# EAGLE board Filter boards jp6 v2.0 moog v1.2.1 - v1.0 (EAGLE 9.6.2)
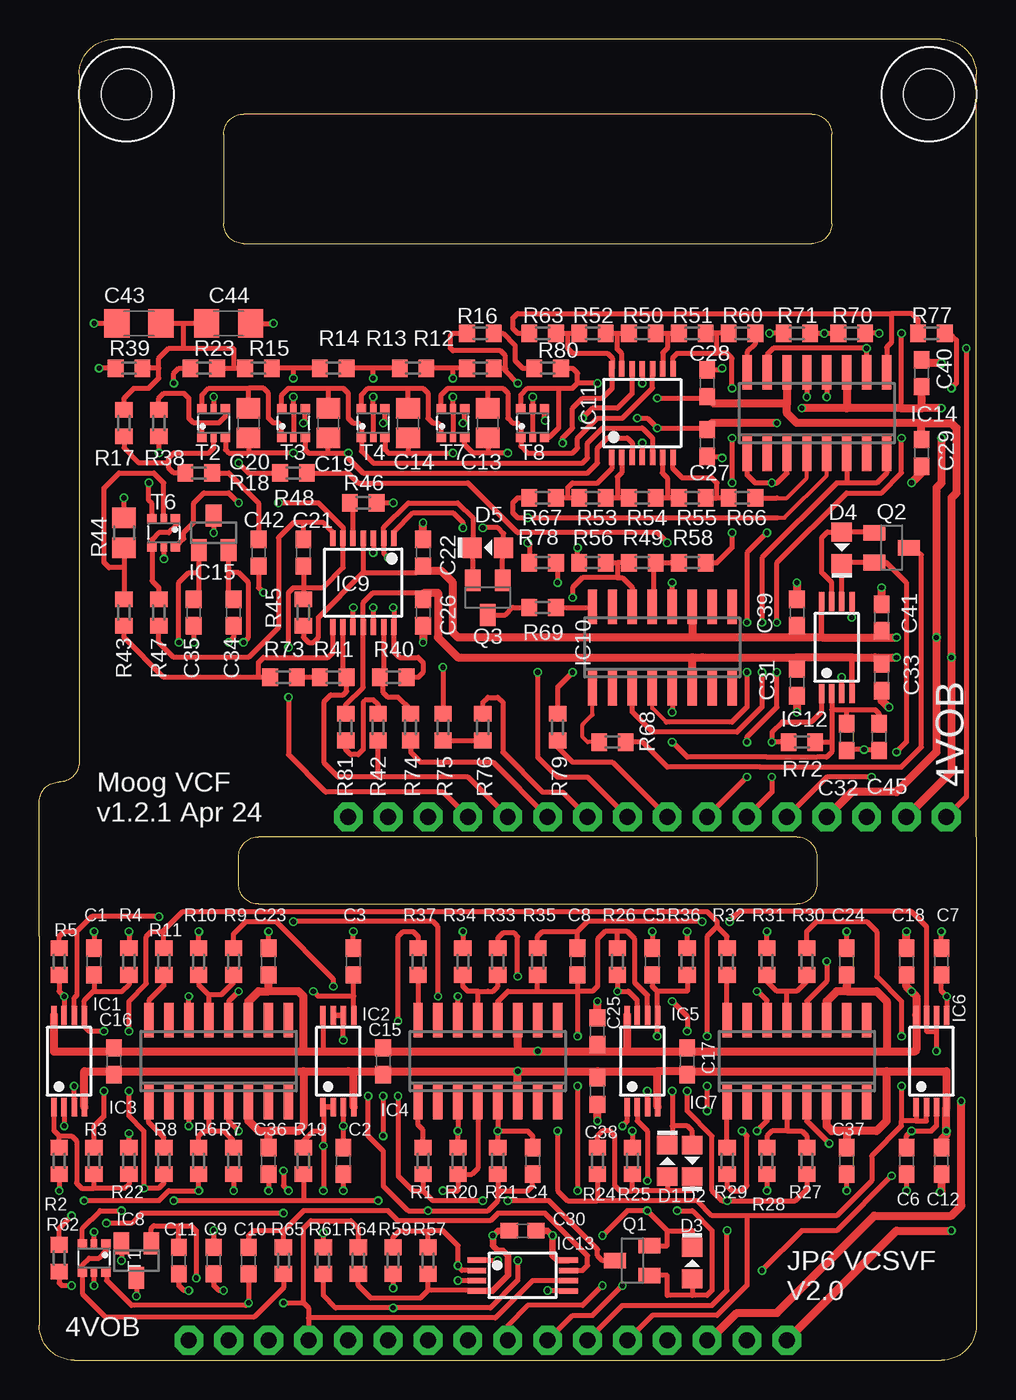
[diagram p0: board, top side]
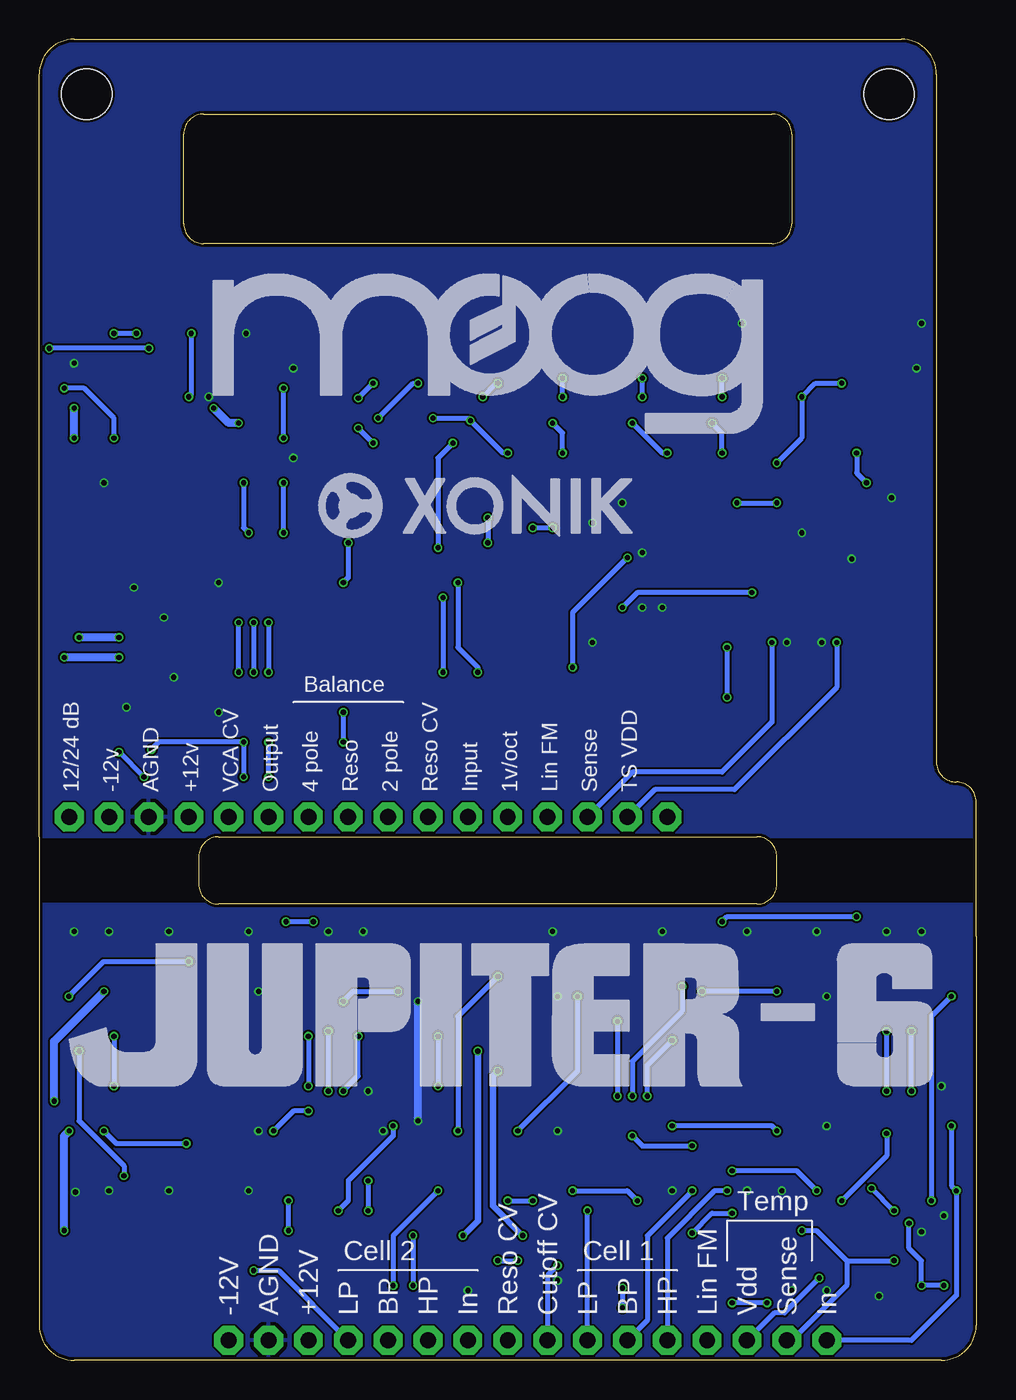
[diagram p1: board, bottom side, seen from below]

Size 59.69 x 84.14 mm. Coordinates in mm from the lower left corner, seen from the top.
Outline: 2.22,0 57.47,0 arc90 59.69,2.22 59.69,29.05 59.69,33.34 59.69,81.92 arc90 57.47,84.14 4.76,84.14 arc90 2.54,81.92 2.54,38.89 2.54,38.1 arc-90 1.27,36.83 arc90 0,35.56 0,26.99 0,2.22 arc90 2.22,0
Outline: 49.21,79.38 13.02,79.38 arc90 11.75,78.11 11.75,72.39 arc90 13.02,71.12 49.21,71.12 arc90 50.48,72.39 50.48,78.11 arc90 49.21,79.38
Outline: 13.97,29.05 arc-90 12.7,30.32 12.7,32.07 arc-90 13.97,33.34 48.26,33.34 arc-90 49.53,32.07 49.53,30.32 arc-90 48.26,29.05 13.97,29.05
Copper layers (1*16): Top 0.035mm / dielectric 1.6mm / Bottom 0.035mm
Design rules "jlcpcb-2layers *": minimum track width 5mil, minimum drill 0.3mm, track to track 5mil, track to pad 5mil, pad to pad 5mil, via to via 5mil, smd to smd 5mil, copper to edge 0.2mm, drill to drill 6mil, minimum pad ring 10mil, minimum via ring 4mil, stop-mask expansion 4mil, vias tented up to drill 0mil, thermal gap 10mil
Holes 3.2 mm at 5.56,80.64 56.67,80.64

## Footprints (pad centres in the part's own frame; a part is rotated, then mirrored left to right if it is on the bottom)
C0603 = smd 1.1 x 1: 1 -0.85,0; 2 0.85,0
C0805 = smd 1.3 x 1.5: 1 -0.95,0; 2 0.95,0
C1206 = smd 1.6 x 1.8: 1 -1.4,0; 2 1.4,0
D0805-J = smd 1.2 x 1.3: A 1,0; C -1,0
TSSOP8J = smd 1.2 x 0.35: 1 -2.925,0.975; 2 -2.925,0.325; 3 -2.925,-0.325; 4 -2.925,-0.975; 5 2.925,-0.975; 6 2.925,-0.325; 7 2.925,0.325; 8 2.925,0.975
SO16-NARROW-J = smd 0.6 x 2.2: 1 -4.445,-2.6; 2 -3.175,-2.6; 3 -1.905,-2.6; 4 -0.635,-2.6; 5 0.635,-2.6; 6 1.905,-2.6; 7 3.175,-2.6; 8 4.445,-2.6; 9 4.445,2.6; 10 3.175,2.6; 11 1.905,2.6; 12 0.635,2.6; 13 -0.635,2.6; 14 -1.905,2.6; 15 -3.175,2.6; 16 -4.445,2.6
SOT23J = smd 1 x 1.4: 1 -0.95,-1.1; 2 0.95,-1.1; 3 0,1.1
TSSOP14J = smd 0.35 x 1: 1 -1.95,-2.825; 2 -1.3,-2.825; 3 -0.65,-2.825; 4 0,-2.825; 5 0.65,-2.825; 6 1.3,-2.825; 7 1.95,-2.825; 8 1.95,2.825; 9 1.3,2.825; 10 0.65,2.825; 11 0,2.825; 12 -0.65,2.825; 13 -1.3,2.825; 14 -1.95,2.825
SOT23-BEC = smd 1 x 1.4: B -0.95,-1.1; C 0,1.1; E 0.95,-1.1
R0603 = smd 1 x 1.1: 1 -0.85,0; 2 0.85,0
R0805 = smd 1.3 x 1.5: 1 -0.95,0; 2 0.95,0
SOT363J = smd 0.6 x 0.6: 1 -0.9,0.75; 3 -0.9,-0.75; 4 0.9,-0.75; 6 0.9,0.75 | smd 0.6 x 0.4: 2 -0.9,0; 5 0.9,0
MA16N-1J = drill 1.016 octagon: 1 -19.05,0; 2 -16.51,0; 3 -13.97,0; 4 -11.43,0; 5 -8.89,0; 6 -6.35,0; 7 -3.81,0; 8 -1.27,0; 9 1.27,0; 10 3.81,0; 11 6.35,0; 12 8.89,0; 13 11.43,0; 14 13.97,0; 15 16.51,0; 16 19.05,0

## Placement (x,y rotation side)
C1  33p  [C0603]  3.49,25.4 90 top
C2  330p  [C0603]  19.37,12.7 270 top
C3  330p  [C0603]  20,25.4 90 top
C4  5p  [C0603]  31.43,12.7 90 top
C5  33p  [C0603]  39.05,25.4 90 top
C6  330p  [C0603]  55.24,12.7 270 top
C7  330p  [C0603]  57.47,25.4 90 top
C8  5p  [C0603]  34.29,25.4 270 top
C9  1uF  [C0603]  11.11,6.35 90 top
C10  47p  [C0603]  13.34,6.35 90 top
C11  1uF  [C0603]  8.89,6.35 90 top
C12  1uF  [C0603]  57.47,12.7 90 top
C13  22n  [C0805]  28.57,59.69 270 top
C14  22n  [C0805]  23.5,59.69 270 top
C15  1uF  [C0603]  21.91,19.05 270 top
C16  1uF  [C0603]  4.76,19.05 270 top
C17  1uF  [C0603]  41.27,19.05 270 top
C18  1uF  [C0603]  55.24,25.4 90 top
C19  22n  [C0805]  18.41,59.69 270 top
C20  22n  [C0805]  13.34,59.69 270 top
C21  100p  [C0603]  16.83,51.44 90 top
C22  1uF  [C0603]  24.45,51.44 270 top
C23  1uF  [C0603]  14.61,25.4 90 top
C24  1uF  [C0603]  51.44,25.4 90 top
C25  1uF  [C0603]  35.56,20.95 90 top
C26  1uF  [C0603]  24.45,47.62 270 top
C27  1uF  [C0603]  42.55,58.42 90 top
C28  1uF  [C0603]  42.55,62.23 90 top
C29  1uF  [C0603]  56.2,57.78 270 top
C30  1uF  [C0603]  30.8,8.26 180 top
C31  1uF  [C0603]  48.26,43.18 270 top
C32  33p  [C0603]  51.44,39.69 270 top
C33  1uF  [C0603]  53.66,43.5 270 top
C34  1uF  [C0603]  12.38,47.62 90 top
C35  1uF  [C0603]  9.84,47.62 90 top
C36  1uF  [C0603]  14.61,12.7 90 top
C37  1uF  [C0603]  51.44,12.7 90 top
C38  1uF  [C0603]  35.56,17.14 90 top
C39  1uF  [C0603]  48.26,47.62 270 top
C40  1uF  [C0603]  56.2,62.87 270 top
C41  1uF  [C0603]  53.66,47.31 270 top
C42  1uF  [C0603]  13.97,51.44 270 top
C43  100uF/6.3V  [C1206]  6.35,66.04 180 top
C44  100uF/6.3V  [C1206]  12.06,66.04 0 top
C45  33p  [C0603]  53.5,39.69 270 top
D1  1N41480805  [D0805-J]  40.01,12.7 270 top
D2  1N41480805  [D0805-J]  41.59,12.7 90 top
D3  1N41480805  [D0805-J]  41.59,6.19 270 top
D4  1N41480805  [D0805-J]  51.12,51.75 90 top
D5  1N41480805  [D0805-J]  28.57,51.75 0 top
IC1  TL072JT  [TSSOP8J]  1.91,19.05 90 top
IC2  TL072JT  [TSSOP8J]  19.05,19.05 90 top
IC3  LM13700SL  [SO16-NARROW-J]  11.43,19.05 0 top
IC4  LM13700SL  [SO16-NARROW-J]  28.57,19.05 0 top
IC5  TL072JT  [TSSOP8J]  38.42,19.05 90 top
IC6  TL072JT  [TSSOP8J]  56.83,19.05 90 top
IC7  LM13700SL  [SO16-NARROW-J]  48.26,19.05 0 top
IC8  MCP9700TT  [SOT23J]  6.19,6.35 180 top
IC9  TL074JT  [TSSOP14J]  20.64,49.53 180 top
IC10  LM13700SL  [SO16-NARROW-J]  39.69,45.4 0 top
IC11  TL074JT  [TSSOP14J]  38.42,60.33 0 top
IC12  TL072JT  [TSSOP8J]  50.8,45.4 90 top
IC13  TL072JT  [TSSOP8J]  30.8,5.4 0 top
IC14  DG403C-JSL  [SO16-NARROW-J]  49.53,60.33 0 top
IC15  MCP9700TT  [SOT23J]  11.11,52.7 0 top
Q1  MMBT3906LT1SMD  [SOT23-BEC]  37.78,6.35 90 top
Q2  MMBT3906LT1SMD  [SOT23-BEC]  54.29,51.75 270 top
Q3  MMBT3906LT1SMD  [SOT23-BEC]  28.57,48.58 180 top
R1  10k  [R0603]  24.45,12.7 90 top
R2  33k  [R0603]  1.27,12.7 90 top
R3  47k  [R0603]  3.49,12.7 90 top
R4  8k2  [R0603]  5.71,25.4 270 top
R5  100k  [R0603]  1.27,25.4 270 top
R6  68k  [R0603]  10.16,12.7 270 top
R7  560R  [R0603]  12.38,12.7 270 top
R8  8k2  [R0603]  7.94,12.7 270 top
R9  68k  [R0603]  12.38,25.4 270 top
R10  560R  [R0603]  10.16,25.4 270 top
R11  8k2  [R0603]  7.94,25.4 270 top
R12  1k  [R0603]  28.1,63.18 0 top
R13  1k  [R0603]  23.81,63.18 0 top
R14  1k  [R0603]  18.73,63.18 0 top
R15  1k  [R0603]  13.97,63.18 0 top
R16  5k6  [R0603]  28.1,65.41 0 top
R17  1k  [R0603]  5.4,59.69 270 top
R18  120k  [R0603]  10.16,56.52 0 top
R19  68k  [R0603]  16.83,12.7 270 top
R20  560R  [R0603]  26.67,12.7 90 top
R21  100k  [R0603]  29.21,12.7 90 top
R22  33k  [R0603]  5.71,12.7 90 top
R23  1k  [R0603]  10.48,63.18 180 top
R24  47k  [R0603]  35.56,12.7 90 top
R25  10k  [R0603]  37.78,12.7 270 top
R26  100k  [R0603]  36.83,25.4 270 top
R27  68k  [R0603]  48.9,12.7 270 top
R28  560R  [R0603]  46.35,12.7 270 top
R29  8k2  [R0603]  43.81,12.7 270 top
R30  68k  [R0603]  48.9,25.4 270 top
R31  560R  [R0603]  46.35,25.4 270 top
R32  8k2  [R0603]  43.81,25.4 270 top
R33  68k  [R0603]  29.21,25.4 270 top
R34  560R  [R0603]  26.99,25.4 90 top
R35  100k  [R0603]  31.75,25.4 270 top
R36  33k  [R0603]  41.27,25.4 270 top
R37  10k  [R0603]  24.13,25.4 270 top
R38  1k  [R0603]  7.62,59.69 90 top
R39  1k  [R0603]  5.71,63.18 0 top
R40  10k  [R0603]  22.54,43.5 180 top
R41  100k  [R0603]  18.73,43.5 0 top
R42  120k  [R0603]  21.59,40.32 90 top
R43  56k  [R0603]  5.4,47.62 90 top
R44  1k  [R0805]  5.4,52.7 90 top
R45  820k  [R0603]  16.83,47.62 270 top
R46  1M  [R0603]  20.64,54.61 0 top
R47  10k  [R0603]  7.62,47.62 270 top
R48  1k  [R0603]  16.19,56.52 180 top
R49  51R  [R0603]  38.42,50.8 0 top
R50  5k1  [R0603]  38.42,65.41 0 top
R51  10k  [R0603]  41.59,65.41 180 top
R52  10k  [R0603]  35.24,65.41 0 top
R53  10k  [R0603]  35.24,54.93 0 top
R54  5k1  [R0603]  38.42,54.93 0 top
R55  10k  [R0603]  41.59,54.93 180 top
R56  200R  [R0603]  35.24,50.8 0 top
R57  330k  [R0603]  24.77,6.35 270 top
R58  200R  [R0603]  41.59,50.8 180 top
R59  100k  [R0603]  22.54,6.35 90 top
R60  100R  [R0603]  44.77,65.41 180 top
R61  15k  [R0603]  18.1,6.35 270 top
R62  560R  [R0603]  1.27,6.51 90 top
R63  100R  [R0603]  32.07,65.41 0 top
R64  1M2  [R0603]  20.32,6.35 270 top
R65  1k5  [R0603]  15.56,6.35 90 top
R66  100R  [R0603]  44.77,54.93 180 top
R67  100R  [R0603]  32.07,54.93 0 top
R68  10k  [R0603]  36.51,39.37 180 top
R69  10k  [R0603]  32.07,47.94 0 top
R70  105k  [R0603]  51.75,65.41 180 top
R71  75k  [R0603]  48.26,65.41 180 top
R72  30k  [R0603]  48.58,39.37 180 top
R73  5k6  [R0603]  15.56,43.5 0 top
R74  100k  [R0603]  23.65,40.32 270 top
R75  3k3  [R0603]  25.72,40.32 90 top
R76  18k  [R0603]  28.26,40.32 270 top
R77  3k9  [R0603]  56.83,65.41 0 top
R78  3k9  [R0603]  32.07,50.8 0 top
R79  22k  [R0603]  33.02,40.32 90 top
R80  330R  [R0603]  32.38,63.18 0 top
R81  15k  [R0603]  19.53,40.32 90 top
T1  BC857BS  [SOT363J]  3.49,6.51 270 top
T2  BC847BS  [SOT363J]  11.11,59.69 90 top
T3  BC847BS  [SOT363J]  16.19,59.69 90 top
T4  BC847BS  [SOT363J]  21.27,59.69 90 top
T6  BC847BS  [SOT363J]  7.94,52.7 270 top
T7  BC847BS  [SOT363J]  26.35,59.69 90 top
T8  BC847BS  [SOT363J]  31.43,59.69 90 top
U$2  [JP6_55]  57.78,17.46 0 bottom
U$3  MA16-1JN  [MA16N-1J]  28.57,1.27 0 top
U$4  [MOOG_35]  48.58,59.05 0 bottom
U$5  [XONIK_LOGO_20]  41.91,52.39 0 bottom
U$6  MA16-1JN  [MA16N-1J]  38.73,34.61 0 top

## Library data of the parts
C1-C45 = rcl; SPICEPREFIX: C
D1-D5 IC1-IC3 IC5-IC15 T1-T4 T6-T8 U$2-U$6 = joakim
IC4 = joakim; SPICEPREFIX: X
Q1-Q3 = transistor-pnp
R1-R81 = rcl; SPICEPREFIX: R

## Nets
2P+: IC14.5 R67.1 R78.1
2P-: IC14.4 R66.1
4P+: IC14.9 R63.1 R77.1
4P-: IC14.16 R60.1
12DB_BAL: R78.2 U$6.8
24DB_BAL: R77.2 U$6.10
+12V: C15.1 C16.1 C17.1 C18.1 C23.1 C24.1 C25.1 C30.1 IC1.8 IC2.8 IC3.11 IC4.11 IC5.8 IC6.8 IC7.11 IC13.8 U$3.14
+12V1: C22.2 C27.2 C39.2 C40.2 C41.2 IC9.4 IC10.11 IC11.4 IC12.8 IC14.11 R45.2 R70.1 R80.2 T8.3 T8.6 U$6.13
-12V: C12.2 C15.2 C16.2 C17.2 C30.2 C36.2 C37.2 C38.2 IC1.4 IC2.4 IC3.6 IC4.6 IC5.4 IC6.4 IC7.6 IC13.4 R57.2 R64.2 U$3.16
-12V1: C26.1 C28.1 C29.1 C31.1 C33.1 IC9.11 IC10.6 IC11.11 IC12.4 IC14.14 R81.2 U$6.15
AUDIO: R74.2 U$6.6
AUDIO_SUM: IC9.13 R40.2 R74.1
BP1: IC2.1 IC2.2 R9.1 R19.1 U$3.6
BP2: IC6.1 IC6.2 R24.1 R30.1 R33.1 U$3.12
CUTOFF_CV: IC13.2 R57.1 R59.2 U$3.8
CUTOFF_CV1: IC9.9 R41.2 R42.1 U$6.5
CUTOFF_IABC: R8.2 R11.1 R29.2 R32.1 T1.3
CUTOFF_LIN_FM: C10.1 IC13.6 R64.1 T1.6 U$3.4
GND: C1.2 C2.2 C3.2 C5.2 C6.2 C7.2 C9.1 C11.1 C12.1 C18.2 C23.2 C24.2 C25.2 C36.1 C37.1 C38.1 IC1.3 IC3.3 IC3.14 IC4.3 IC4.14 IC5.3 IC7.3 IC7.14 IC8.3 IC13.3 IC13.5 R4.1 R7.2 R10.1 R20.2 R25.1 R28.2 R31.1 R34.2 R36.1 R62.2 T1.2 U$3.15
GND1: C22.1 C26.2 C27.1 C28.2 C29.2 C31.2 C33.2 C34.1 C35.1 C39.1 C40.1 C41.1 C43.2 C44.2 IC9.3 IC9.10 IC9.12 IC12.3 IC12.5 IC14.13 IC15.3 R39.1 R44.2 R46.2 R71.2 T6.5 U$6.14
HP1: IC1.7 R5.2 R6.2 U$3.5
HP2: IC5.7 R26.2 R27.2 U$3.11
IN1: IC1.2 R2.1 U$3.1
IN2: C8.2 IC4.12 IC5.6 R26.1 R35.2 U$3.10
LIN_FM: C21.1 IC9.6 R45.1 T6.6 U$6.4
LP1: C4.1 IC2.6 IC2.7 R21.1 U$3.7
LP2: C8.1 IC6.6 IC6.7 R35.1 U$3.13
N$1: C14.1 T4.6 T7.1
N$2: IC3.1 R8.1
N$3: IC3.16 R11.2
N$4: IC4.1 R1.2
N$5: C19.1 IC11.5 T3.6 T4.1
N$6: C1.1 IC1.5 R3.2 R4.2
N$7: C4.2 IC1.6 IC4.5 R5.1 R21.2
N$8: D3.A IC5.1 Q1.B
N$9: IC3.4 R6.1 R7.1
N$10: IC7.1 R29.1
N$11: C20.1 T2.6 T3.1
N$12: C2.1 IC2.3 IC3.5
N$13: IC7.16 R32.2
N$14: IC3.13 R9.2 R10.2
N$15: C3.1 IC2.5 IC3.12
N$16: C19.2 IC11.3 T3.3 T4.4
N$17: D1.A D2.C R24.2 R25.2
N$18: C20.2 T2.3 T3.4
N$19: C14.2 T4.3 T7.4
N$20: C13.2 IC11.12 T7.3 T8.4
N$21: IC7.4 R27.1 R28.1
N$22: C13.1 IC11.10 T7.6 T8.1
N$23: C6.1 IC6.3 IC7.5
N$24: IC7.13 R30.2 R31.2
N$25: C7.1 IC6.5 IC7.12
N$26: R14.1 R15.2 T3.2 T3.5
N$27: IC4.13 R33.2 R34.1
N$28: IC4.16 R37.2
N$29: C5.1 D1.C D2.A IC5.5 R36.2
N$30: R12.1 R13.2 T7.2 T7.5
N$31: R17.2 R18.1 T2.2
N$32: C43.1 C44.1 R15.1 R17.1 R23.1 R39.2
N$33: R23.2 R48.2 T2.5
N$34: R38.1 T6.3
N$35: C42.1 R18.2
N$36: IC4.4 R19.2 R20.1 R22.2
N$37: C42.2 IC9.14 R40.1
N$38: IC9.8 R43.1 R73.1
N$39: R43.2 R44.1 T6.2
N$40: IC13.1 R59.1 R61.2
N$41: C21.2 IC9.7 R47.2
N$42: R61.1 R62.1 T1.5
N$43: C10.2 IC13.7 R65.2
N$44: IC9.5 R46.1
N$45: R65.1 T1.1 T1.4
N$46: R47.1 T6.1 T6.4
N$47: IC10.12 R48.1
N$48: IC10.13 R49.2 R58.2
N$49: IC11.13 R50.1 R52.2
N$50: IC11.14 R52.1 R56.1 R63.2
N$51: IC11.9 R50.2 R51.2
N$52: IC11.8 R51.1 R58.1 R60.2
N$53: IC11.2 R53.2 R54.1
N$54: IC11.1 R53.1 R67.2
N$55: IC11.6 R54.2 R55.2
N$56: IC11.7 R55.1 R66.2
N$57: C32.1 C45.1 IC10.5 IC12.2 R72.1
N$58: D4.A IC12.7 Q2.B
N$59: Q2.C R68.1
N$60: D5.A IC9.1 Q3.B
N$61: Q3.C R69.1
N$62: R13.1 R14.2 T4.2 T4.5
N$63: R38.2 T2.1 T2.4
N$64: R12.2 R16.1 T8.2 T8.5
N$65: IC14.12 R70.2 R71.1
N$66: R41.1 R73.2
N$67: R75.1 R76.2
N$68: R16.2 R80.1
N$69: R42.2 R81.1
OUTPUT: C32.2 C45.2 IC12.1 R72.2 U$6.11
POLES_SWITCH: IC14.10 IC14.15 U$6.16
RESO_BAL: R79.1 U$6.9
RESO_BAL_SPLIT: IC10.14 R49.1 R56.2 R79.2
RESO_CV: D3.C IC5.2 Q1.E U$3.9
RESO_CV1: R76.1 U$6.7
RESO_CV_MIX: D5.C IC9.2 Q3.E R75.2
RESO_I_ABC: IC10.16 R69.2
RESO_IABC: Q1.C R1.1 R37.1
SVF1_IN: IC1.1 R2.2 R3.1 R22.1
TEMP_SENSE: C9.2 IC8.2 U$3.2
TEMP_SENSE1: C34.2 IC15.2 U$6.3
TS_VDD: C11.2 IC8.1 U$3.3
TS_VDD1: C35.2 IC15.1 U$6.2
VCA_CV: D4.C IC12.6 Q2.E U$6.12
VCA_I_ABC: IC10.1 R68.2
VCA_NEG: IC10.4 IC14.1 IC14.3
VCA_POS: IC10.3 IC14.6 IC14.8

## Tracks (layer width: path | path; a pad name or v marks a point on that pad's centre or on a via)
2P+  (via drill 0.33)
  Top 0.254: 46.99,53.66 47.47,53.66 50.16,56.36 IC14.5
  Top 0.305: R67.1 30.48,54.93 30.16,54.61 30.16,53.98 30.48,53.66 v31.11,53.66 46.99,53.66 | v31.11,52.07 31.22,51.97 R78.1
  Bottom 0.305: v31.11,53.66 v31.11,52.07
2P-
  Top 0.254: 46.99,54.93 47.62,54.93 48.9,56.2 IC14.4
  Top 0.305: R66.1 46.99,54.93
4P+
  Top 0.305: IC14.9 53.98,64.51 54.29,64.83 54.29,65.72 54.29,66.67 | R63.1 30.48,65.41 30.16,65.72 30.16,66.36 30.48,66.67 54.29,66.67 | R77.1 55.98,66.25 55.56,66.67 54.29,66.67
4P-
  Top 0.305: R60.1 45.62,64.73 45.09,64.19 IC14.16
12DB_BAL  (via drill 0.33)
  Top 0.305: R78.2 33.02,50.7 v33.02,49.53 | v31.75,43.81 31.75,38.42 33.02,37.15 34.92,37.15 U$6.8
  Bottom 0.305: v33.02,49.53 33.02,45.4 31.75,44.13 v31.75,43.81
24DB_BAL  (via drill 0.33)
  Top 0.305: U$6.10 v45.09,37.15 | v45.09,39.37 45.09,39.69 46.99,41.59 v46.99,43.81 | v46.99,46.99 46.99,50.8 51.44,55.24 53.66,55.24 54.93,56.52 v54.93,58.74 | v58.1,61.91 58.42,62.23 58.42,64.98 58,65.41 R77.2
  Bottom 0.305: v45.09,37.15 v45.09,39.37 | v46.99,43.81 v46.99,46.99 | v54.93,58.74 54.93,60.01 56.83,61.91 v58.1,61.91
+12V  (via drill 0.33)
  Top 0.305: C16.1 4.76,19.68 | 18.1,19.68 18.07,19.7 IC2.8 | C15.1 21.91,19.68 | C25.1 35.56,19.68 | C17.1 41.27,19.68
  Top 0.406: IC13.8 33,6.37 32.7,6.67 v32.7,7.94 32.38,8.26 C30.1
  Top 0.508: IC1.8 0.93,19.67 0.93,19.68 4.76,19.68 16.83,19.68 | 16.83,19.68 18.1,19.68 21.91,19.68 30.48,19.68 | 30.48,19.68 v31.75,19.68 35.56,19.68 37.47,19.68 | 37.47,19.68 41.27,19.68 53.98,19.68 | 53.98,19.68 55.82,19.68 55.86,19.78 IC6.8 55.86,23.2 v55.56,23.5 55.24,23.81 C18.1 | 16.83,19.68 16.83,23.18 16.51,23.5 14.61,23.5 | 14.61,23.5 C23.1 | IC4.11 30.48,19.68 | IC5.8 37.44,19.69 37.47,19.68 | C24.1 51.44,23.81 51.44,23.5 | 51.44,23.5 53.34,23.5 53.98,22.86 53.98,19.68 | 14.61,23.5 13.97,23.5 13.34,22.86 IC3.11 | v58.74,16.51 58.74,9.84 58.1,9.21 53.18,9.21 46.99,3.02 44.45,3.02 42.7,1.27 U$3.14 | 51.44,23.5 50.8,23.5 50.16,22.86 IC7.11
  Bottom 0.406: v32.7,7.94 31.75,8.89 v31.75,19.68
  Bottom 0.508: v58.74,16.51 58.74,20.32 v55.56,23.5
+12V1  (via drill 0.33)
  Top 0.305: v38.42,58.42 IC11.4 | C27.2 42.49,59.32 42.44,59.37 v39.37,59.37 38.73,60.01 v38.1,60.01 | 54.93,60.64 v54.93,65.41 | v53.5,65.41 R70.1 | IC9.4 20.64,50.16 | 20.64,50.16 24.03,50.16 C22.2 | R45.2 16.83,46.04 17.14,45.72 17.46,45.72 17.78,46.04 17.78,47.31 20.64,50.16 | T8.3 32.5,58.79 33.08,59.37 33.08,61.91 | 33.08,61.91 31.11,61.91 30.68,61.48 T8.6 | 33.08,61.91 33.97,61.91 34.29,62.23 | 34.29,62.23 34.29,62.87 33.97,63.18 R80.2 | v35.56,62.23 34.29,62.23
  Top 0.356: IC12.8 49.83,46.06 49.85,46.04
  Top 0.508: 53.76,46.04 49.85,46.04 48.26,46.04 | C40.2 56.2,60.64 | 56.2,60.64 54.93,60.64 51.44,60.64 | IC14.11 51.44,60.64 | 42.49,59.32 42.86,59.69 v46.99,59.69 | 51.44,60.64 v48.58,60.64 | 48.26,46.04 42.23,46.04 41.59,46.04 | IC10.11 41.59,46.04 | 48.26,46.04 C39.2 | C22.2 24.77,50.27 25.61,50.27 26.35,49.53 26.35,46.35 26.67,46.04 41.59,46.04 | 53.76,46.04 53.66,46.14 C41.2 | 53.76,46.04 v54.61,46.04 | U$6.13 51.75,36.2 54.61,36.2 57.15,38.73 v57.15,46.04 57.15,55.56 57.47,55.88 v57.47,58.74 | v57.47,60.64 56.2,60.64
  Bottom 0.305: v39.37,59.37 v38.42,58.42 | v54.93,65.41 v53.5,65.41 | v38.1,60.01 35.88,62.23 v35.56,62.23
  Bottom 0.508: v46.99,59.69 47.62,59.69 v48.58,60.64 | v57.47,58.74 v57.47,60.64 | v54.61,46.04 v57.15,46.04
-12V  (via drill 0.33)
  Top 0.305: C16.2 4.76,18.41 | C15.2 21.91,18.41 | C38.2 35.56,18.41 | C17.2 41.27,18.41 | IC13.4 27.85,4.45 24.77,4.45 | 24.77,4.45 R57.2 | R64.2 20.32,4.76 21.11,3.97 24.29,3.97 24.77,4.45
  Top 0.406: IC13.4 28.87,4.42 29.84,5.4 29.84,6.67 29.53,6.99 29.21,6.99 28.89,7.3 v28.89,7.94 29.21,8.26 C30.2
  Top 0.508: IC1.4 2.88,18.4 2.89,18.41 4.76,18.41 16.83,18.41 | 16.83,18.41 19.68,18.41 | 19.68,18.41 21.91,18.41 v30.48,18.41 | v30.48,18.41 35.56,18.41 39.39,18.41 | 53.98,18.41 41.27,18.41 39.39,18.41 | 53.98,18.41 57.81,18.41 IC6.4 57.78,16.1 v57.78,14.61 57.78,14.37 57.47,14.05 C12.2 | C36.2 14.61,14.61 | 16.83,18.41 16.83,14.92 16.51,14.61 14.61,14.61 | IC4.6 v30.48,18.41 | IC5.4 39.39,18.41 | 51.44,14.61 C37.2 | 51.44,14.61 53.34,14.61 53.98,15.24 53.98,18.41 | IC3.6 13.34,15.24 13.97,14.61 14.61,14.61 | IC2.4 20.02,18.32 19.68,18.41 | U$3.16 54.61,8.26 v58.1,8.26 | 51.44,14.61 50.48,14.61 50.16,14.92 IC7.6
  Bottom 0.406: v28.89,7.94 30.8,9.84 30.8,18.1 v30.48,18.41
  Bottom 0.508: v57.78,14.61 58.1,14.29 v58.1,8.26
-12V1  (via drill 0.33)
  Top 0.305: IC11.11 v38.42,62.23 | v39.37,61.28 42.44,61.28 C28.1 | IC9.11 20.64,46.99 | 20.64,46.99 20.64,48.26 21.27,48.9 24.45,48.9 C26.1 | R81.2 19.53,41.75 20.64,42.86 20.64,46.99
  Top 0.356: IC12.4 51.75,42.5 51.75,44.77
  Top 0.508: 48.26,44.77 51.75,44.77 53.24,44.77 | 53.24,44.77 C33.1 | C29.1 56.2,59.69 | 56.2,59.69 48.26,59.69 47.62,60.33 47.62,60.96 | IC10.6 41.59,44.77 | 41.59,44.77 42.23,44.77 48.26,44.77 | 48.26,44.77 48.26,44.45 C31.1 | C26.1 24.45,48.79 24.55,48.9 25.4,48.9 25.4,46.04 26.67,44.77 41.59,44.77 | 53.24,44.77 v54.61,44.77 | U$6.15 58.1,37.47 v58.1,44.77 58.1,54.93 58.42,55.24 58.42,59.37 58.1,59.69 56.2,59.69 | 47.62,60.96 42.97,60.96 C28.1 | 47.62,60.96 47.47,60.96 47.62,61.01 IC14.14
  Bottom 0.305: v38.42,62.23 v39.37,61.28
  Bottom 0.508: v54.61,44.77 v58.1,44.77
AUDIO
  Top 0.305: R74.2 23.65,38.73 24.29,38.1 28.89,38.1 U$6.6
AUDIO_SUM
  Top 0.305: IC9.13 21.94,43.81 | 21.94,43.81 21.94,43.74 R40.2 | R74.1 23.65,41.43 22.86,42.23 22.23,42.23 21.91,42.55 21.91,43.78 21.94,43.81
BP1  (via drill 0.33)
  Top 0.305: 18.1,14.61 18.1,16.12 IC2.2 IC2.1 | 18.1,14.61 v18.1,13.65 v18.1,10.79 | R9.1 12.38,27.15 13.18,27.94 15.08,27.94 18.73,24.29 v18.73,23.81 | v21.91,16.83 v21.91,14.29 | R19.1 16.83,13.97 17.46,14.61 18.1,14.61
  Bottom 0.305: v18.1,13.65 21.27,13.65 v21.91,14.29 | v18.1,10.79 20.95,7.94 20.95,2.54 U$3.6 | v18.73,23.81 18.73,22.23 21.91,19.05 v21.91,16.83
BP2  (via drill 0.33)
  Top 0.305: v30.48,24.45 30.48,26.99 30.27,27.2 29.53,27.2 29.21,26.89 R33.1 | R30.1 48.9,27.3 49.53,27.94 52.7,27.94 53.34,27.3 53.34,24.45 54.93,22.86 v54.93,20.64 | v54.93,17.46 54.93,15.24 | 45.09,9.21 50.8,9.21 53.02,11.43 53.02,13.02 54.93,14.92 54.93,15.24 | 45.09,9.21 42.86,9.21 41.91,10.16 35.56,10.16 | IC6.2 56.51,15.25 56.5,15.24 55.86,15.24 | 55.86,15.24 54.93,15.24 | IC6.1 55.86,15.24 | 45.09,9.21 45.09,4.76 43.18,2.86 39.05,2.86 U$3.12 | v33.02,14.61 33.02,10.79 33.66,10.16 35.56,10.16 | R24.1 35.56,10.16
  Bottom 0.305: v30.48,24.45 33.02,21.91 v33.02,14.61 | v54.93,20.64 v54.93,17.46
CUTOFF_CV  (via drill 0.33)
  Top 0.305: IC13.2 26.92,5.72 26.67,5.97 v26.67,6.03 v26.68,6.04 26.68,7.29 25.72,8.26 24.77,8.26 | R59.2 22.54,7.83 22.96,8.26 24.77,8.26 | R57.1 24.77,8.26
  Bottom 0.305: v26.67,6.03 27.3,5.4 U$3.8
CUTOFF_CV1
  Top 0.305: 21.59,37.15 R42.1 | U$6.5 27.3,37.15 21.59,37.15 | 21.59,37.15 19.05,37.15 18.15,38.04 18.15,41.97 18.57,42.39 19.37,42.39 19.58,42.6 R41.2 19.34,43.74 IC9.9
CUTOFF_IABC  (via drill 0.33)
  Top 0.305: v5.71,20.95 5.71,22.86 6.83,23.97 6.83,26.99 7.14,27.3 7.94,27.3 | R11.1 7.94,27.3 | 7.94,27.3 7.94,27.36 9.15,28.57 42.55,28.57 43.18,27.94 43.18,27.62 | R32.1 43.81,26.99 43.18,27.62 | v5.71,17.14 5.71,15.56 6.67,14.61 v6.67,10.95 7.62,10.95 7.94,11.27 R8.2 | 43.18,27.62 42.55,26.99 v42.55,20.64 | R29.2 43.81,11.11 44.13,10.79 44.77,10.79 45.09,11.11 45.09,14.29 v44.77,14.61 | v42.55,17.46 v42.55,15.88 | v5.24,9.53 3.87,9.53 2.74,8.4 T1.3
  Bottom 0.305: v5.71,17.14 v5.71,20.95 | v42.55,20.64 v42.55,17.46 | v42.55,15.88 43.5,15.88 v44.77,14.61 | v5.24,9.53 v6.67,10.95
CUTOFF_LIN_FM  (via drill 0.33)
  Top 0.305: R64.1 20.32,8.41 19.84,8.89 17.3,8.89 16.83,8.41 16.83,3.65 | T1.6 4.29,5.57 4.29,5.08 5.87,3.49 13.18,3.49 v13.34,3.65 C10.1 | IC13.6 31.43,5.07 29.05,2.7 17.14,2.7 | 17.14,2.7 17.14,3.33 16.83,3.65 | 17.14,2.7 U$3.4 | v15.56,3.65 16.83,3.65
  Bottom 0.305: v13.34,3.65 v15.56,3.65
GND  (via drill 0.33)
  Top 0.305: IC3.14 v9.53,23.18 | R10.1 v10.16,27.3 | C23.2 v14.61,27.3 | C36.1 v14.61,10.79 | R7.2 v12.38,10.79 | v5.71,27.3 R4.1 | v3.49,27.3 C1.2 | IC1.3 v2.23,17.45 v2.22,17.46 | IC3.3 v9.53,14.92 | IC4.14 v26.67,23.18 | v26.99,27.3 R34.2 | IC4.3 v26.67,14.61 R20.2 | v39.05,27.3 C5.2 | 46.35,22.92 45.78,23.5 v45.72,23.5 | 46.35,22.92 | IC7.14 46.35,22.92 | C24.2 v51.44,27.3 | R31.1 v46.35,27.3 | IC7.3 46.35,15.24 v45.72,14.61 | v51.44,10.79 C37.1 | R28.2 v46.35,10.79 | v37.78,14.61 R25.1 | IC13.3 v26.68,5.07 v26.67,5.08 | C7.2 v57.47,27.3 | C3.2 v20,27.3 | R36.1 v41.27,27.3 | IC5.3 38.73,16.13 v38.73,17.14 | IC13.5 32.41,4.42 v32.38,4.45 | C2.2 v19.37,10.79 | C6.2 v55.24,10.79 | T1.2 v3.49,8.18 | R62.2 1.27,8.41 v2.06,9.21 | IC8.3 v6.19,4.09 | C11.1 8.89,4.76 9.21,4.45 v9.53,4.45 | C9.1 11.11,4.76 11.43,4.45 v11.75,4.45
  Top 0.508: C25.2 v35.56,22.86 | v35.56,15.24 C38.1 | C18.2 v55.24,27.3 | C12.1 57.47,10.79 v57.39,10.72
  Bottom 0.508: v35.56,15.24 v35.56,22.86
  pour Bottom: 59.69,29.05 59.69,-0.95 -0.64,-0.95 -0.95,-0.64 -0.95,29.05
GND1  (via drill 0.33)
  Top 0.305: IC12.3 v51.12,43.5 | IC12.5 51.77,47.33 v51.75,47.31 | C28.2 43.4,63.08 v43.5,63.18 | C27.1 43.4,57.57 v43.5,57.47 | R71.2 v46.51,65.41 | IC14.13 v48.9,61.36 | T6.5 v7.94,51.04 | R39.1 v3.81,63.18 | v22.56,54.61 R46.2 | IC9.12 21.29,47.93 v21.27,47.94 | IC9.10 19.99,47.93 v20,47.94 | IC9.3 21.29,51.45 v21.27,51.44 | R44.2 v5.4,54.93 | C43.2 v3.49,66.04 | C44.2 v14.92,66.04 | C34.1 12.38,46.04 v12.06,45.72 | IC15.3 v11.11,52.7 | C35.1 v9.84,45.72
  Top 0.508: v57.47,63.5 56.41,63.5 C40.1 | C29.2 56.2,56.52 v55.56,55.88 | v48.26,49.53 C39.1 | C31.2 v48.26,41.27 | C26.2 v24.45,45.72 | C22.1 v24.45,53.34 | C41.1 v53.66,49.21 | v54.13,41.59 54.08,41.59 53.66,42.01 C33.2
  pour Bottom: 60.64,33.34 -0.64,33.34 -0.64,83.74 1.03,85.41 60.64,85.41
HP1  (via drill 0.33)
  Top 0.305: IC1.7 v1.59,23.18 1.27,23.5 R5.2 | R6.2 v10.16,10.79 8.26,10.79 7.62,10.16 v2.86,10.16 | v15.56,12.06 15.56,11.11 v15.88,10.79
  Bottom 0.305: v1.59,23.18 2.86,21.91 v2.86,10.16 | v10.16,10.79 11.43,12.06 v15.56,12.06 | v15.88,10.79 16.67,10.79 19.68,7.78 U$3.5
HP2  (via drill 0.33)
  Top 0.305: IC5.7 38.09,22.93 37.52,23.5 v36.83,23.5 R26.2 | R27.2 48.9,10.9 48.16,10.16 v43.81,10.16 43.5,10.16 42.86,10.79 42.86,14.29 41.27,15.88 v41.27,17.14 | v40.32,22.86 41.27,21.91 v41.27,20.95 | U$3.11 37.15,3.49 42.86,3.49 43.81,4.45 v43.81,8.26
  Bottom 0.305: v40.32,22.86 39.69,23.5 v36.83,23.5 | v41.27,20.95 v41.27,17.14 | v43.81,8.26 v43.81,10.16
IN1  (via drill 0.33)
  Top 0.305: v1.59,14.92 v1.58,14.93 IC1.2 | R2.1 v1.27,10.79
  Bottom 0.305: v1.59,14.92 1.59,11.11 v1.27,10.79 1.27,4.13 4.13,1.27 U$3.1
IN2  (via drill 0.33)
  Top 0.305: IC4.12 29.21,22.86 29.84,23.5 31.75,23.5 | 31.75,23.5 R35.2 | 31.75,23.5 34.29,23.5 | C8.2 34.29,23.5 | IC5.6 38.74,23.25 37.94,24.05 37.94,26.83 37.47,27.3 36.83,27.3 | 34.29,23.5 v34.29,20.64 | v34.29,17.46 v34.29,10.79 | U$3.10 33.97,2.86 35.24,2.86 v37.15,4.76 | 36.83,27.3 36.04,27.3 35.56,26.83 35.56,23.81 35.24,23.5 34.29,23.5 | R26.1 36.83,27.3
  Bottom 0.305: v34.29,20.64 v34.29,17.46 | v34.29,10.79 37.15,7.94 v37.15,4.76
LIN_FM  (via drill 0.33)
  Top 0.305: C21.1 16.83,49.21 | 16.83,49.21 18.1,49.21 19.37,50.48 19.37,52.33 | 19.37,52.33 IC9.6 | v15.88,42.23 15.88,38.58 18.26,36.2 25.72,36.2 U$6.4 | T6.6 9.21,52.33 9.21,52.7 9.84,53.34 9.84,54.61 10.48,55.24 12.06,55.24 v12.7,54.61 | v15.24,54.61 17.78,54.61 19.37,53.02 19.37,52.33 | 16.83,49.21 16.19,49.21 15.88,48.9 v15.88,45.4 | 16.83,49.21 R45.1
  Bottom 0.305: v15.88,45.4 v15.88,42.23 | v15.24,54.61 v12.7,54.61
LP1  (via drill 0.33)
  Top 0.305: v19.37,20.38 19.37,21.97 19.36,21.98 IC2.7 IC2.6 | R21.1 29.21,10.79 | 29.21,10.79 29.21,10.16 28.57,9.53 v24.77,9.53 23.5,9.53 21.91,11.11 21.91,13.34 20.95,14.29 v20.95,16.83 | 29.21,10.79 31.11,10.79 31.43,11.11 C4.1
  Bottom 0.305: v19.37,20.38 20.95,18.79 v20.95,16.83 | U$3.7 v24.77,9.53
LP2  (via drill 0.33)
  Top 0.305: C8.1 34.29,27.3 | 34.29,27.3 34.92,27.94 v42.23,27.94 | v43.97,27.94 44.61,28.57 55.56,28.57 56.52,27.62 IC6.7 56.52,21.97 56.52,20.95 57.16,20.95 | R35.1 31.75,26.99 32.07,27.3 34.29,27.3 | IC6.6 57.16,20.95 | 57.16,20.95 57.16,19.69 v57.15,19.68 | v54.29,11.75 50.8,8.26 48.58,8.26 v46.04,5.71
  Bottom 0.305: v43.97,27.94 v42.23,27.94 | v57.15,19.68 57.15,15.24 54.29,12.38 v54.29,11.75 | v46.04,5.71 44.45,5.71 U$3.13
N$1
  Top 0.305: C14.1 23.5,61.91 | 23.5,61.91 24.45,61.91 24.77,61.59 24.77,60.01 25.08,59.69 25.4,59.69 25.6,59.49 T7.1 | T4.6 20.52,61.48 20.95,61.91 23.5,61.91
N$2
  Top 0.305: R8.1 7.94,14.19 6.99,15.14 IC3.1
N$3
  Top 0.305: R11.2 7.94,23.87 6.99,22.92 IC3.16
N$4
  Top 0.305: R1.2 24.45,14.66 24.13,14.98 IC4.1
N$5
  Top 0.305: T3.6 15.44,61.48 15.88,61.91 18.41,61.91 | 18.41,61.91 C19.1 | 18.41,61.91 19.37,61.91 19.68,61.59 19.68,60.01 20,59.69 20.32,59.69 20.52,59.49 T4.1 20.52,57.9 21.27,57.15 34.61,57.15 34.92,57.47 34.92,58.42 35.88,59.37 38.42,59.37 39.07,58.72 IC11.5
N$6  (via drill 0.33)
  Top 0.305: 3.49,23.5 5.29,23.5 5.71,23.91 R4.2 | 3.49,23.5 3.45,23.5 2.88,22.93 IC1.5 2.86,21.95 2.86,21.27 3.17,20.95 v4.13,20.95 | C1.1 3.49,23.5 | v4.13,17.14 4.13,15.56 3.49,14.92 R3.2
  Bottom 0.305: v4.13,17.14 v4.13,20.95
N$7  (via drill 0.33)
  Top 0.305: 2.39,27.3 2.39,23.25 2.23,23.09 IC1.6 | IC4.5 v29.21,14.61 | R21.2 v29.21,14.61 | v25.4,23.18 25.4,27.62 25.08,27.94 v16.19,27.94 | v7.62,28.26 3.34,28.26 2.39,27.3 | R5.1 1.27,26.99 1.59,27.3 2.39,27.3 | v29.21,14.61 31.11,14.61 31.43,14.29 C4.2
  Bottom 0.305: v25.4,23.18 25.4,18.41 v29.21,14.61 | v16.19,27.94 15.88,28.26 v7.62,28.26
N$8  (via drill 0.33)
  Top 0.305: D3.A 41.59,4.13 | 41.59,4.13 40.01,4.13 40.01,5.4 40,5.4 Q1.B | IC5.1 37.44,15.22 v37.15,14.92 | v40.64,9.53 41.59,9.53 42.86,8.26 42.86,4.45 42.55,4.13 41.59,4.13
  Bottom 0.305: v37.15,14.92 37.15,14.29 40.01,11.43 40.01,10.16 v40.64,9.53
N$9
  Top 0.305: R7.1 12.38,13.97 11.75,14.61 11.43,14.61 10.79,14.61 | IC3.4 10.79,14.61 | R6.1 10.16,14.29 10.48,14.61 10.79,14.61
N$10
  Top 0.305: R29.1 IC7.1
N$11
  Top 0.305: C20.1 13.34,61.91 | T2.6 10.36,61.48 10.79,61.91 13.34,61.91 | T3.1 15.44,59.49 15.24,59.69 14.92,59.69 14.61,60.01 14.61,61.59 14.29,61.91 13.34,61.91
N$12  (via drill 0.33)
  Top 0.305: v12.7,14.61 12.06,15.24 IC3.5 | IC2.3 v19.37,14.92 19.37,14.61 C2.1
  Bottom 0.305: v12.7,14.61 13.02,14.92 v19.37,14.92 | v19.37,14.92
N$13
  Top 0.305: IC7.16 R32.2
N$14
  Top 0.305: 10.79,23.28 IC3.13 | R9.2 12.38,24.07 11.59,23.28 11.43,23.28 10.79,23.28 | R10.2 10.16,23.91 10.79,23.28
N$15  (via drill 0.33)
  Top 0.305: v12.7,23.5 12.06,22.86 IC3.12 | C3.1 20,24.69 20.02,24.75 20.02,23.18 | IC2.5 20.02,23.18 | v17.46,23.5 17.78,23.18 20.02,23.18
  Bottom 0.305: v12.7,23.5 v17.46,23.5
N$16  (via drill 0.33)
  Top 0.305: T3.3 16.94,57.99 17.14,57.78 18.41,57.78 | 18.41,57.78 C19.2 | 18.41,57.78 v19.68,57.78 19.68,57.47 20.64,56.52 34.92,56.52 35.56,57.15 35.56,58.1 36.2,58.74 37.47,58.74 37.78,58.42 37.78,57.52 IC11.3 | v21.91,59.69 22.02,59.8 T4.4
  Bottom 0.305: v19.68,57.78 20,57.78 v21.91,59.69
N$17
  Top 0.305: D2.C 41.59,10.79 40.01,10.79 | 40.01,10.79 37.78,10.79 | 37.78,10.79 R25.2 | D1.A 40.01,10.79 | R24.2 35.56,14.29 35.88,14.61 36.35,14.61 36.67,14.29 36.67,11.11 36.99,10.79 37.78,10.79
N$18  (via drill 0.33)
  Top 0.305: C20.2 13.34,57.78 | v16.19,57.78 13.34,57.78 | v16.83,59.69 16.94,59.8 T3.4 | T2.3 11.86,57.99 12.06,57.78 13.34,57.78
  Bottom 0.305: v16.19,57.78 16.19,59.05 v16.83,59.69
N$19  (via drill 0.33)
  Top 0.305: T4.3 22.02,57.99 22.23,57.78 23.5,57.78 | 23.5,57.78 v26.35,57.78 | v26.99,59.69 27.1,59.8 T7.4 | C14.2 23.5,57.78
  Bottom 0.305: v26.35,57.78 26.35,59.05 v26.99,59.69
N$20  (via drill 0.33)
  Top 0.305: T7.3 27.1,58.3 27.62,57.78 28.57,57.78 | C13.2 28.57,57.78 | v32.23,59.85 32.18,59.89 T8.4 | v29.84,57.78 28.57,57.78 | IC11.12 37.78,63.13 37.78,61.59 36.83,60.64 35.24,60.64 v34.61,60.01
  Bottom 0.305: v29.84,57.78 30.16,57.78 v32.23,59.85 32.38,60.01 v34.61,60.01
N$21
  Top 0.305: IC7.4 47.62,14.61 | 47.62,14.61 48.26,14.61 48.58,14.61 48.9,14.29 R27.1 | 47.62,14.61 46.67,14.61 46.35,14.29 R28.1
N$22
  Top 0.305: T7.6 25.6,61.48 26.04,61.91 28.57,61.91 | 28.57,61.91 29.53,61.91 29.84,61.59 29.84,60.01 30.16,59.69 30.48,59.69 30.68,59.49 T8.1 30.68,58.22 31.11,57.78 33.97,57.78 34.29,58.1 34.29,58.74 35.56,60.01 37.15,60.01 39.07,61.93 IC11.10 | C13.1 28.57,61.91
N$23  (via drill 0.33)
  Top 0.305: IC7.5 48.9,15.24 v50.32,13.81 | IC6.3 57.16,14.92 56.84,14.61 v55.57,14.61 v55.56,14.61 55.24,14.29 C6.1
  Bottom 0.305: v55.57,14.61 54.78,13.81 v50.32,13.81
N$24
  Top 0.305: R30.2 48.9,24.13 48.26,23.5 47.62,23.5 | IC7.13 47.62,23.5 | 47.62,23.5 46.99,23.5 46.35,24.13 R31.2
N$25  (via drill 0.33)
  Top 0.305: v50.16,25.4 50.16,24.13 48.9,22.86 IC7.12 | IC6.5 v57.81,23.18 57.47,23.52 C7.1
  Bottom 0.305: v50.16,25.4 55.59,25.4 v57.81,23.18
N$26  (via drill 0.33)
  Top 0.305: T3.2 T3.5 v16.19,61.36 | R14.1 16.19,63.18 | 16.19,63.18 R15.2 | v16.19,62.55 16.19,63.18
  Bottom 0.305: v16.19,61.36 v16.19,62.55
N$27
  Top 0.305: IC4.13 27.94,23.5 | 27.94,23.5 28.57,23.5 28.89,23.5 29.21,23.81 R33.2 | 27.94,23.5 27.3,23.5 26.99,23.81 R34.1
N$28
  Top 0.305: R37.2 IC4.16
N$29  (via drill 0.33)
  Top 0.305: IC5.5 39.39,22.21 | 39.39,22.21 39.37,22.18 39.37,23.5 | C5.1 39.05,23.81 39.37,23.5 | R36.2 41.27,23.5 39.37,23.5 | D1.C 40.32,14.02 40.32,14.92 | v40.32,17.14 40.32,14.92 | D2.A 41.59,14.61 41.27,14.92 40.32,14.92 | v39.37,20.64 39.37,22.18 39.39,22.21
  Bottom 0.305: v40.32,17.14 39.37,18.1 v39.37,20.64
N$30  (via drill 0.33)
  Top 0.305: T7.2 T7.5 v26.35,61.36 | v26.35,62.55 26.35,63.18 | 26.35,63.18 R13.2 | R12.1 26.35,63.18
  Bottom 0.305: v26.35,61.36 v26.35,62.55
N$31
  Top 0.305: R17.2 5.4,58.1 6.35,57.15 8.26,57.15 | R18.1 8.57,56.52 8.26,56.83 8.26,57.15 | T2.2 11.11,58.1 10.79,57.78 8.57,57.78 8.26,57.47 8.26,57.15
N$32
  Top 0.305: 12.38,63.18 R15.1 | R17.1 5.4,61.28 6.03,61.91 6.99,61.91 7.62,62.55 7.62,63.18 | 12.38,63.18 12.38,64.45 9.21,64.45 | R23.1 12.38,63.18 | 7.62,63.18 R39.2 | 7.62,63.18 7.62,63.82 8.26,64.45 9.21,64.45 | C44.1 9.21,66.04 | 9.21,66.04 C43.1 | 9.21,64.45 9.21,66.04
N$33  (via drill 0.33)
  Top 0.305: v11.11,61.36 T2.5 | v12.7,57.15 13.34,56.52 R48.2 | v8.57,62.23 8.57,62.87 8.89,63.18 R23.2
  Bottom 0.305: v8.57,62.23 10.24,62.23 v11.11,61.36 11.11,58.74 v12.7,57.15
N$34  (via drill 0.33)
  Top 0.305: T6.3 7.19,54.56 6.99,54.76 v6.99,55.88 | R38.1 v7.62,57.78
  Bottom 0.305: v7.62,57.78 7.62,56.52 v6.99,55.88
N$35
  Top 0.305: R18.2 12.06,56.52 13.97,54.61 C42.1
N$36  (via drill 0.33)
  Top 0.305: R22.2 v5.71,14.45 | v25.72,10.79 26.67,10.79 R20.1 27.57,11.85 27.94,12.22 IC4.4 | v21.59,10.16 16.83,10.16 | 16.83,10.16 v8.57,10.16 | R19.2 16.83,10.16
  Bottom 0.305: v8.57,10.16 5.71,13.02 v5.71,14.45 | v25.72,10.79 22.23,10.79 v21.59,10.16
N$37  (via drill 0.33)
  Top 0.305: R40.1 24.13,43.5 24.45,43.81 24.45,44.45 24.13,44.77 22.94,44.77 22.59,45.12 IC9.14 22.59,47.9 v22.54,47.94 | C42.2 13.97,49.21 v14.29,48.9
  Bottom 0.305: v14.29,48.9 21.59,48.9 v22.54,47.94
N$38
  Top 0.305: R43.1 5.4,46.04 7.94,43.5 13.97,43.5 | R73.1 13.97,43.5 | 13.97,43.5 13.97,44.45 14.29,44.77 18.41,44.77 18.73,45.09 18.73,46.66 IC9.8
N$39
  Top 0.305: R44.1 5.4,50.48 | 5.4,50.48 R43.2 | 5.4,50.48 4.45,50.48 4.13,50.8 4.13,55.56 5.08,56.52 7.3,56.52 7.94,55.88 T6.2
N$40  (via drill 0.33)
  Top 0.305: R61.2 18.1,4.13 18.89,3.33 v22.54,3.33 28.73,3.33 30.48,5.08 v30.48,6.35 | R59.1 v22.54,4.6 | IC13.1 28.55,6.37 28.57,6.35 v29.21,6.35
  Bottom 0.305: v22.54,4.6 v22.54,3.33 | v30.48,6.35 v29.21,6.35
N$41
  Top 0.305: C21.2 16.83,53.34 | 16.83,53.34 16.19,53.34 15.24,52.39 15.24,46.67 13.34,44.77 8.57,44.77 7.62,45.72 R47.2 | IC9.7 18.69,52.75 18.1,53.34 16.83,53.34
N$42  (via drill 0.33)
  Top 0.305: R62.1 1.27,4.92 1.43,4.76 v2.06,4.76 | v3.49,4.76 T1.5 | v15.56,9.37 6.51,9.37 5.87,8.73 v4.29,8.73 | R61.1 v18.1,8.1
  Bottom 0.305: v2.06,4.76 v3.49,4.76 3.49,6.35 4.29,7.14 v4.29,8.73 | v18.1,8.1 16.83,9.37 v15.56,9.37
N$43
  Top 0.305: R65.2 15.56,8.26 | 15.56,8.26 13.65,8.26 13.34,7.94 C10.2 | IC13.7 34.62,5.72 34.92,6.03 34.92,6.67 32.23,9.37 29.21,9.37 28.73,8.89 22.86,8.89 22.23,9.53 16.83,9.53 15.56,8.26
N$44
  Top 0.305: IC9.5 19.99,54.41 R46.1
N$45
  Top 0.305: T1.1 4.24,6.94 3.81,6.51 3.17,6.51 2.74,6.08 T1.4 2.74,4.24 4.21,2.78 13.73,2.78 15.56,4.6 R65.1
N$46
  Top 0.305: T6.1 8.69,53.14 8.26,52.7 7.62,52.7 7.19,52.27 T6.4 7.19,49.65 7.62,49.21 R47.1
N$47  (via drill 0.33)
  Top 0.305: IC10.12 v40.32,49.53 | v40.01,52.07 39.37,52.7 30.48,52.7 27.3,55.88 20.32,55.88 19.68,56.52 R48.1
  Bottom 0.305: v40.32,49.53 40.01,49.85 v40.01,52.07
N$48
  Top 0.305: IC10.13 39.11,48.23 39.11,50.64 R49.2 R58.2
N$49
  Top 0.305: IC11.13 37.12,64.11 36.83,64.39 36.83,65.41 | R52.2 36.83,65.41 | 36.83,65.41 R50.1
N$50  (via drill 0.33)
  Top 0.305: R63.2 33.66,65.41 | 33.66,65.41 R52.1 | 33.66,65.41 33.66,64.45 33.97,64.14 36.2,64.14 36.51,63.82 36.51,63.2 | 36.51,63.2 IC11.14 | R56.1 34.29,50.8 v34.29,51.75 | v33.34,58.42 33.34,58.74 33.97,59.37 33.97,60.64 34.61,61.28 35.88,61.28 36.51,61.91 36.51,63.2
  Bottom 0.305: v33.34,58.42 34.29,57.47 v34.29,51.75
N$51
  Top 0.305: R50.2 40.01,65.41 | 40.01,65.41 R51.2 | 40.01,65.41 40.01,64.45 39.72,64.17 IC11.9
N$52  (via drill 0.33)
  Top 0.305: IC11.8 40.37,63.86 40.64,64.14 43.18,64.14 | 43.18,64.14 43.18,65.41 | 43.18,65.41 R51.1 | R60.2 43.18,65.41 | R58.1 43.18,50.8 44.13,51.75 v44.13,52.7 | v44.13,58.74 v44.13,55.88 | v44.13,61.91 44.13,63.82 43.81,64.14 43.18,64.14
  Bottom 0.305: v44.13,52.7 v44.13,55.88 | v44.13,58.74 v44.13,61.91
N$53
  Top 0.305: R54.1 36.83,54.93 | 36.83,54.93 R53.2 | IC11.2 37.12,56.55 36.83,56.26 36.83,54.93
N$54
  Top 0.305: R53.1 33.66,54.93 | 33.66,54.93 33.66,55.56 33.97,55.88 35.56,55.88 36.51,56.83 36.51,57.45 IC11.1 | 33.66,54.93 R67.2
N$55
  Top 0.305: R55.2 40.01,54.93 | IC11.6 39.69,57.47 39.69,56.52 40.01,56.2 40.01,54.93 | 40.01,54.93 R54.2
N$56
  Top 0.305: R55.1 43.18,54.93 | 43.18,54.93 43.18,55.88 42.86,56.2 40.96,56.2 40.37,56.79 IC11.7 | R66.2 43.18,54.93
N$57  (via drill 0.33)
  Top 0.305: IC10.5 v40.32,41.27 | v40.32,39.37 41.27,38.42 46.35,38.42 49.53,38.42 50.16,38.42 50.48,38.73 50.48,39.37 | IC12.2 50.48,41.43 | 50.48,41.43 50.48,39.37 | R72.1 50.48,39.37 | C45.1 53.5,41.17 53.24,41.43 51.44,41.43 | 50.48,41.43 51.44,41.43 | C32.1 51.44,41.43
  Bottom 0.305: v40.32,41.27 v40.32,39.37
N$58
  Top 0.305: IC12.7 50.48,49.54 49.85,50.16 49.85,52.39 50.21,52.75 D4.A 53.14,52.75 Q2.B
N$59
  Top 0.305: Q2.C 55.73,51.75 56.2,51.29 56.2,39.05 54.93,37.78 45.94,37.78 40.01,37.78 38.42,39.37 R68.1
N$60  (via drill 0.33)
  Top 0.305: IC9.1 22.59,52.75 23.81,53.98 26.35,53.98 26.99,53.34 v26.99,53.02 | Q3.B 29.52,51.7 D5.A 29.57,52.66 29.21,53.02 v28.26,53.02
  Bottom 0.305: v28.26,53.02 v26.99,53.02
N$61
  Top 0.305: R69.1 30.16,47.94 29.7,47.48 Q3.C
N$62  (via drill 0.33)
  Top 0.305: T4.2 T4.5 v21.27,61.36 | v21.27,62.55 21.27,63.18 | 21.27,63.18 R14.2 | R13.1 21.27,63.18
  Bottom 0.305: v21.27,61.36 v21.27,62.55
N$63
  Top 0.305: T2.4 11.86,60.12 11.43,59.69 10.48,59.69 | R38.2 7.62,61.28 7.94,61.59 9.21,61.59 9.53,61.28 9.53,60.01 9.84,59.69 10.48,59.69 | T2.1 10.36,59.58 10.48,59.69
N$64  (via drill 0.33)
  Top 0.305: v30.48,62.23 29.69,63.02 29.69,63.18 | R12.2 29.69,63.18 | T8.2 T8.5 v31.43,61.36 | 29.69,63.18 29.69,63.98 29.37,64.29 26.35,64.29 26.19,64.45 26.19,65.25 26.35,65.41 R16.1
  Bottom 0.305: v31.43,61.36 30.56,62.23 v30.48,62.23
N$65  (via drill 0.33)
  Top 0.305: R71.1 v50.01,65.41 R70.2 | IC14.12 v50.16,61.36
  Bottom 0.305: v50.01,65.41 50.01,61.52 v50.16,61.36
N$66
  Top 0.305: R41.1 R73.2
N$67
  Top 0.305: R75.1 R76.2
N$68
  Top 0.305: R16.2 29.53,65.41 30.32,64.61 30.32,63.66 30.8,63.18 R80.1
N$69
  Top 0.305: R42.2 21.59,41.75 21.27,42.07 20.8,42.07 20.64,41.91 20.64,38.89 20.32,38.58 19.84,38.58 19.53,38.89 R81.1
OUTPUT  (via drill 0.33)
  Top 0.305: IC12.1 49.83,41.3 49.19,40.66 47.33,40.66 46.67,40.01 v46.67,39.37 R72.2 | v46.67,37.15 46.67,36.2 U$6.11 | C45.2 53.44,38.89 v52.55,38.89 51.49,38.89 C32.2
  Bottom 0.305: v46.67,37.15 v46.67,39.37 52.07,39.37 v52.55,38.89
POLES_SWITCH  (via drill 0.33)
  Top 0.305: IC14.10 v52.7,64.45 46.77,64.45 46.35,64.04 IC14.15 | v59.05,64.45 59.05,35.88 U$6.16
  Bottom 0.305: v52.7,64.45 v59.05,64.45
RESO_BAL
  Top 0.305: R79.1 33.02,39.05 33.97,38.1 36.51,38.1 U$6.9
RESO_BAL_SPLIT  (via drill 0.33)
  Top 0.305: R56.2 36.83,50.8 | R49.1 36.83,50.8 | 36.83,50.8 36.83,49.85 | 36.83,49.85 37.15,49.85 37.78,49.21 IC10.14 | 36.83,49.85 34.61,49.85 33.97,49.21 v33.97,48.58 | R79.2 33.02,42.86 v33.97,43.81
  Bottom 0.305: v33.97,48.58 v33.97,43.81
RESO_CV  (via drill 0.33)
  Top 0.305: Q1.E 40.01,7.3 40.01,8.26 | 40.01,8.26 41.59,8.26 D3.C | IC5.2 38.09,15.25 38.73,14.61 v38.73,11.43 | 40.01,8.26 v38.73,9.53 37.47,9.53 v35.88,7.94 | v35.88,4.76 34.61,3.49 31.11,3.49 29.84,2.22 U$3.9
  Bottom 0.305: v38.73,11.43 v38.73,9.53 | v35.88,7.94 v35.88,4.76
RESO_CV1
  Top 0.305: R76.1 28.26,41.91 28.57,42.23 29.21,42.23 29.53,41.91 29.53,38.73 32.07,36.2 33.34,36.2 U$6.7
RESO_CV_MIX  (via drill 0.33)
  Top 0.305: Q3.E 27.62,51.7 D5.C 27.62,51.8 27.62,53.66 26.67,54.61 23.5,54.61 21.94,53.05 IC9.2 21.94,51.41 v22.23,51.12 | v25.72,44.13 R75.2
  Bottom 0.305: v22.23,51.12 25.72,47.62 v25.72,44.13
RESO_I_ABC
  Top 0.305: R69.2 35.18,47.94 IC10.16
RESO_IABC  (via drill 0.33)
  Top 0.305: v22.86,16.83 22.86,11.75 23.81,10.79 24.45,10.79 | R1.1 24.45,10.79 | v29.84,10.16 32.46,10.16 35.56,7.06 35.56,6.67 35.88,6.35 Q1.C | v28.26,10.16 25.08,10.16 24.45,10.79 | v22.86,21.59 22.86,26.99 23.18,27.3 23.81,27.3 24.13,26.99 R37.1
  Bottom 0.305: v22.86,21.59 v22.86,16.83 | v29.84,10.16 v28.26,10.16
SVF1_IN
  Top 0.305: IC1.1 0.93,14.63 1.27,14.29 | R2.2 1.27,14.29 | R22.1 5.71,11.21 5.45,10.95 3.49,10.95 | 3.49,10.95 R3.1 | 1.27,14.29 2.06,14.29 2.38,13.97 2.38,11.27 2.7,10.95 3.49,10.95
TEMP_SENSE  (via drill 0.33)
  Top 0.305: IC8.2 v5.24,6.35 | v11.11,8.26 C9.2
  Bottom 0.305: 8.26,6.35 v5.24,6.35 | 8.26,6.35 10.16,8.26 v11.11,8.26 | 8.26,6.35 8.26,4.76 11.75,1.27 U$3.2
TEMP_SENSE1  (via drill 0.33)
  Top 0.305: 12.06,50.16 12.7,50.16 13.34,49.53 13.34,46.04 v13.02,45.72 | IC15.2 12.06,50.48 12.06,50.16 | C34.2 12.06,48.79 12.06,50.16
  Bottom 0.305: v13.02,45.72 13.02,40.64 16.19,37.47 21.91,37.47 U$6.3
TS_VDD  (via drill 0.33)
  Top 0.305: v10,5.24 10,8.26 9.68,8.57 8.89,8.57 | IC8.1 7.14,8.41 7.3,8.57 8.89,8.57 | C11.2 8.89,8.57
  Bottom 0.305: v10,5.24 12.22,3.02 12.86,3.02 U$3.3
TS_VDD1  (via drill 0.33)
  Top 0.305: 10.16,50.17 10.16,50.16 9.53,50.16 8.89,49.53 v8.89,45.72 | IC15.1 10.16,50.17 | 10.16,50.17 10.16,48.8 C35.2
  Bottom 0.305: v8.89,45.72 8.89,42.86 15.4,36.35 20.48,36.35 U$6.2
VCA_CV  (via drill 0.33)
  Top 0.305: IC12.6 D4.C 51.17,50.8 Q2.E 53.97,50.8 55.24,49.53 55.24,39.37 v54.61,38.73 | v53.02,37.15 50.16,37.15 U$6.12
  Bottom 0.305: v54.61,38.73 v53.02,37.15
VCA_I_ABC
  Top 0.254: R68.2 34.92,39.37 34.61,39.69 34.61,40.48 35.24,41.12 IC10.1
VCA_NEG  (via drill 0.33)
  Top 0.254: 39.95,40.64 39.05,41.54 IC10.4
  Top 0.305: IC14.1 45.09,56.41 45.61,55.88 v46.67,55.88 46.99,55.88 47.6,56.49 47.62,56.5 IC14.3 | v46.35,52.7 45.09,51.44 v45.09,46.99 | v45.09,43.81 45.09,41.59 44.13,40.64 39.95,40.64
  Bottom 0.305: v46.67,55.88 46.67,53.02 v46.35,52.7 | v45.09,46.99 v45.09,43.81
VCA_POS  (via drill 0.33)
  Top 0.305: 51.44,55.88 53.34,55.88 53.98,56.52 IC14.8 | 51.44,55.88 50.8,55.88 46.04,51.12 v46.04,46.99 | IC14.6 51.44,55.88 | v46.04,43.81 46.04,41.59 44.45,40.01 39.05,40.01 37.78,41.27 IC10.3
  Bottom 0.305: v46.04,46.99 v46.04,43.81

## Text on the board
tNames: 4VOB | Moog VCF / v1.2.1 Apr 24 | JP6 VCSVF | V2.0 | 4VOB
bNames: Balance | TS VDD | Sense | Lin FM | 1v/oct | Input | Reso CV | 2 pole | Reso | 4 pole | Output | VCA CV | +12v | AGND | -12v | 12/24 dB | Temp | Cell 1 | Cell 2 | In | Sense | Vdd | Lin FM | HP | BP | LP | Cutoff CV | Reso CV | In | HP | BP | LP | +12V | AGND | -12V